# EAGLE board l298n_x1_v2 (EAGLE 5.06)
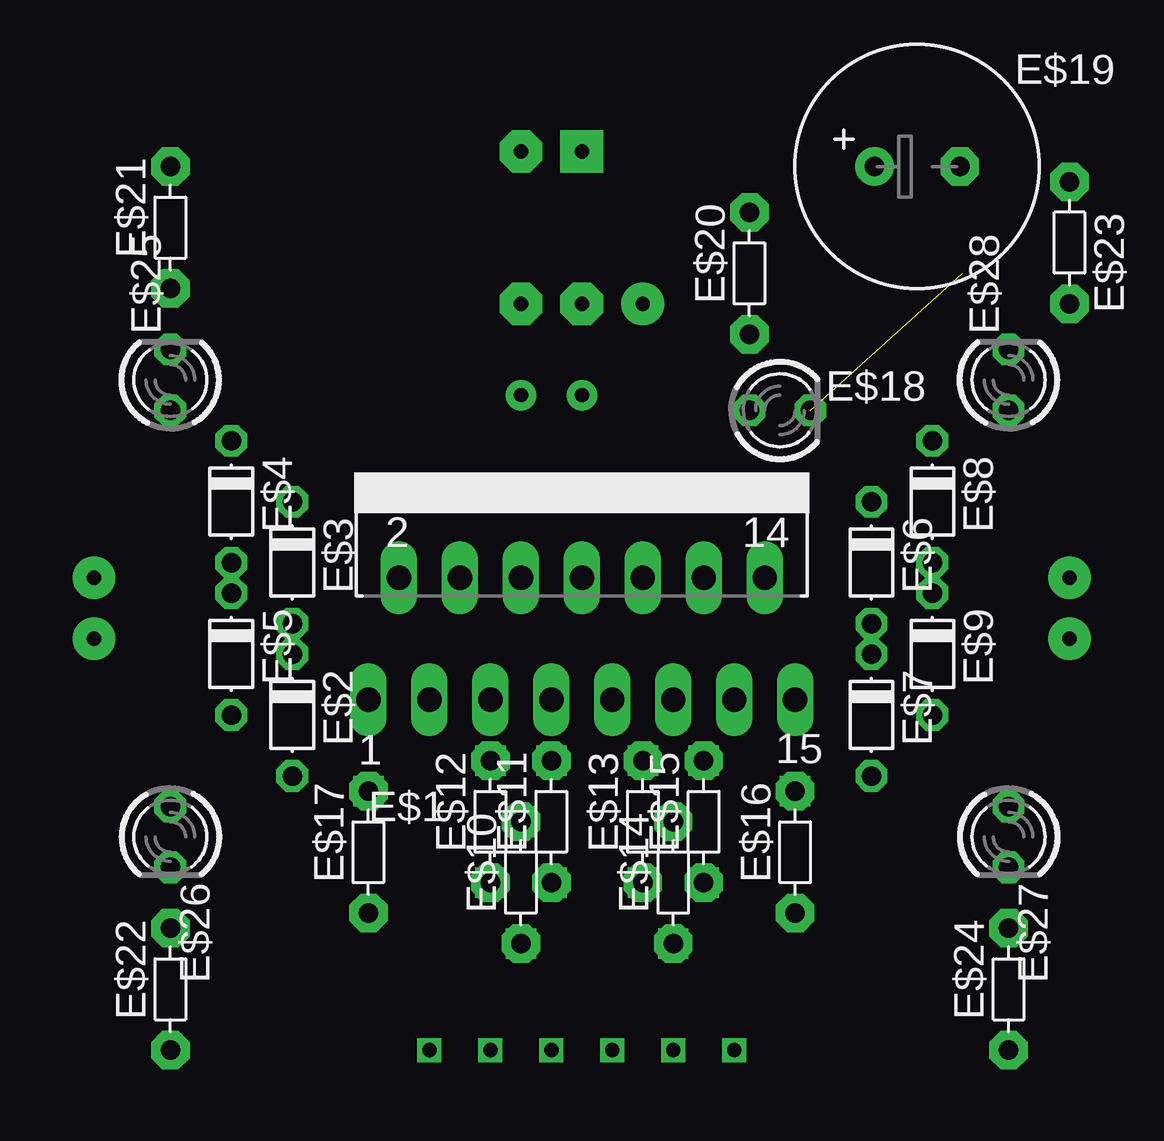
[diagram p0: board, top side]
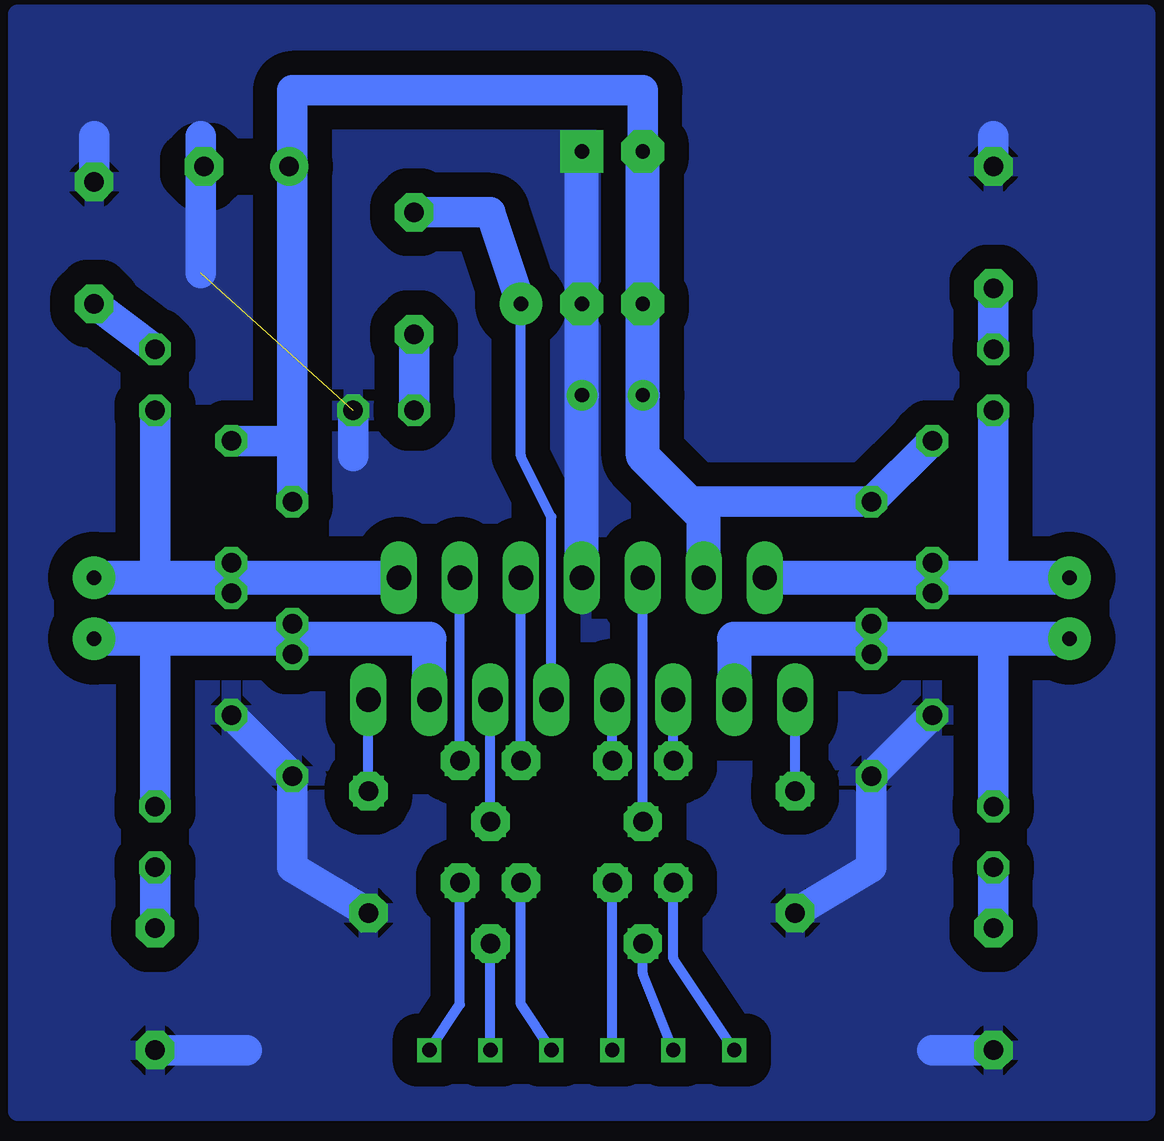
[diagram p1: board, bottom side, seen from below]

No outline drawn. Coordinates in mm, seen from the top.
Copper layers (1*16): Top 0.035mm / dielectric 1.5mm / Bottom 0.035mm
Design rules "default *": minimum track width 10mil, minimum drill 24mil, track to track 40mil, track to pad 40mil, pad to pad 8mil, via to via 8mil, smd to smd 8mil, copper to edge 40mil, drill to drill 8mil, minimum pad ring 10mil, minimum via ring 8mil, stop-mask expansion 4mil, vias tented up to drill 0mil, thermal gap 10mil

## Footprints (pad centres in the part's own frame; a part is rotated, then mirrored left to right if it is on the bottom)
MULTIWATT-15 = drill 1.016 long: 1 -8.89,-7.62; 2 -7.62,-2.54; 3 -6.35,-7.62; 4 -5.08,-2.54; 5 -3.81,-7.62; 6 -2.54,-2.54; 7 -1.27,-7.62; 8 0,-2.54; 9 1.27,-7.62; 10 2.54,-2.54; 11 3.81,-7.62; 12 5.08,-2.54; 13 6.35,-7.62; 14 7.62,-2.54; 15 8.89,-7.62
D-5 = drill 0.813 octagon: A 2.54,0; C -2.54,0
R-5 = drill 0.813 pad 1.6 octagon: 1 -2.54,0; 2 2.54,0
LED3MM = drill 0.813 octagon: A -1.27,0; K 1.27,0
E3,5-10 = drill 0.813 pad 1.6 round: + -1.778,0 | drill 0.813 pad 1.6 octagon: - 1.778,0

## Placement (x,y rotation side)
E$1  [MULTIWATT-15]  24.77,24.77 0 top
E$2  [D-5]  12.7,16.51 270 top
E$3  [D-5]  12.7,22.86 270 top
E$4  [D-5]  10.16,25.4 270 top
E$5  [D-5]  10.16,19.05 270 top
E$6  [D-5]  36.83,22.86 270 top
E$7  [D-5]  36.83,16.51 270 top
E$8  [D-5]  39.37,25.4 270 top
E$9  [D-5]  39.37,19.05 270 top
E$10  [R-5]  22.23,9.53 90 top
E$11  [R-5]  23.5,12.06 90 top
E$12  [R-5]  20.95,12.06 90 top
E$13  [R-5]  27.3,12.06 90 top
E$14  [R-5]  28.57,9.53 90 top
E$15  [R-5]  29.84,12.06 90 top
E$16  [R-5]  33.66,10.79 90 top
E$17  [R-5]  15.88,10.79 90 top
E$18  [LED3MM]  33.02,29.21 0 top
E$19  [E3,5-10]  38.73,39.37 0 top
E$20  [R-5]  31.75,34.92 90 top
E$21  [R-5]  7.62,36.83 90 top
E$22  [R-5]  7.62,5.08 90 top
E$23  [R-5]  45.09,36.2 270 top
E$24  [R-5]  42.55,5.08 90 top
E$25  [LED3MM]  7.62,30.48 90 top
E$26  [LED3MM]  7.62,11.43 270 top
E$27  [LED3MM]  42.55,11.43 270 top
E$28  [LED3MM]  42.55,30.48 90 top

## Library data of the parts
E$1 = ref-packages
E$2-E$9 = diode
E$10-E$17 E$20-E$24 = discrete
E$18 E$25-E$28 = led
E$19 = rcl

## Nets
GND: E$1.8 E$2.A E$5.A E$7.A E$9.A E$16.1 E$17.1 E$18.K E$21.2 E$22.1 E$23.1 E$24.1
S$1: E$1.1
S$2: E$1.15
S$3: E$1.9 E$20.2
S$4: E$1.3
S$5: E$1.2
S$6: E$18.A E$20.1
S$7: E$1.14 E$28.A
S$9: E$1.6
S$11: E$1.12
S$12: E$1.11
S$13: E$1.10
S$14: E$1.13 E$27.A
S$15: E$22.2 E$26.K
S$16: E$1.4 E$3.C E$4.C E$6.C E$8.C
S$17: E$26.A
S$18: E$1.5
S$20: E$1.7
S$24: E$25.A
S$25: E$21.1 E$25.K
S$29: E$24.2 E$27.K
S$30: E$23.2 E$28.K

## Tracks (layer width: path | path; a pad name or v marks a point on that pad's centre or on a via)
GND  (via drill 0.6 pad 1.27, 0.6 pad 1.78)  (1 unrouted)
  Bottom 1.27: E$5.A E$2.A 12.7,10.16 E$17.1 | E$9.A E$7.A 36.83,10.16 E$16.1 | 34.29,27.3 E$18.K | 40.64,34.92 40.64,40.64 | E$23.1 45.09,40.64 | E$21.2 7.62,40.64 | E$22.1 10.16,2.54 | 38.73,2.54 E$24.1
  Bottom 1.422: v24.77,40.01 v24.77,33.66 v24.77,29.84 E$1.8
  pour Bottom: 1.27,0 1.27,45.72 48.26,45.72 48.26,0
S$1  (via drill 0.6 pad 1.27)
  Bottom 0.406: v15.88,13.34 E$1.1
S$2  (via drill 0.6 pad 1.27)
  Bottom 0.406: v33.66,13.34 E$1.15
S$3  (via drill 0.6 pad 1.78)
  Bottom 0.406: E$1.9 26.04,24.77 27.3,27.3 v27.3,33.66
  Bottom 1.27: E$20.2 28.57,37.47 v27.3,33.66
S$4  (via drill 0.6 pad 1.78)
  Bottom 1.422: v4.45,19.68 18.41,19.68 E$1.3
S$5  (via drill 0.6 pad 1.78)
  Bottom 1.422: v4.45,22.23 E$1.2
S$6
  Bottom 1.27: E$18.A E$20.1
S$7  (via drill 0.6 pad 1.78)
  Bottom 1.27: 42.55,22.23 E$28.A
  Bottom 1.422: E$1.14 42.55,22.23 v45.09,22.23
S$8  (via drill 0.6, 0.6 pad 1.27)
  Bottom 0.406: v20.95,9.53 20.95,6.35 v18.41,2.54
S$9  (via drill 0.6 pad 1.27)
  Bottom 0.406: v22.23,12.06 E$1.6
S$10  (via drill 0.6, 0.6 pad 1.27)
  Bottom 0.406: v23.5,2.54 v23.5,9.53
S$11  (via drill 0.6 pad 1.27)
  Bottom 0.406: v29.84,14.61 E$1.12
S$12  (via drill 0.6 pad 1.27)
  Bottom 0.406: v28.57,12.06 E$1.11
S$13  (via drill 0.6 pad 1.27)
  Bottom 0.406: v27.3,14.61 E$1.10
S$14  (via drill 0.6 pad 1.78)
  Bottom 1.27: 42.55,19.68 E$27.A
  Bottom 1.422: v45.09,19.68 42.55,19.68 31.11,19.68 E$1.13
S$15
  Bottom 1.27: E$22.2 E$26.K
S$16  (via drill 0.6 pad 1.27, 0.6 pad 1.78)
  Bottom 1.27: E$8.C 36.83,27.94 E$6.C 36.83,42.55 22.23,42.55 v22.23,40.01 | E$4.C E$3.C 20.32,25.4
  Bottom 1.422: v22.23,40.01 v22.23,33.66 v22.23,29.84 22.23,27.3 20.32,25.4 19.68,24.77 E$1.4
S$17
  Bottom 1.27: E$26.A 7.62,19.05
S$18  (via drill 0.6 pad 1.27)
  Bottom 0.406: v20.95,14.61 E$1.5
S$19  (via drill 0.6, 0.6 pad 1.27)
  Bottom 0.406: v22.23,6.99 22.23,5.71 v20.95,2.54
S$20  (via drill 0.6 pad 1.27)
  Bottom 0.406: v23.5,14.61 E$1.7
S$21  (via drill 0.6, 0.6 pad 1.27)
  Bottom 0.406: v27.3,9.53 27.3,4.45 v26.04,2.54
S$22  (via drill 0.6, 0.6 pad 1.27)
  Bottom 0.406: v28.57,2.54 v28.57,6.99
S$23  (via drill 0.6, 0.6 pad 1.27)
  Bottom 0.406: v29.84,9.53 29.84,4.45 v31.11,2.54
S$24
  Bottom 1.27: 7.62,22.86 E$25.A
S$25
  Bottom 1.27: E$25.K E$21.1
S$29
  Bottom 1.27: E$24.2 E$27.K
S$30
  Bottom 1.27: E$28.K E$23.2